# Altium PCB Mikrofonvorverstärker.PcbDoc
Units mm, origin at the board's own origin, x right, y up, seen from the top; angles counter-clockwise.
Board outline 150 x 75 mm, 2 copper layers (Top Layer, Bottom Layer); 137 components, 87 nets, 356 pads, 19 vias.
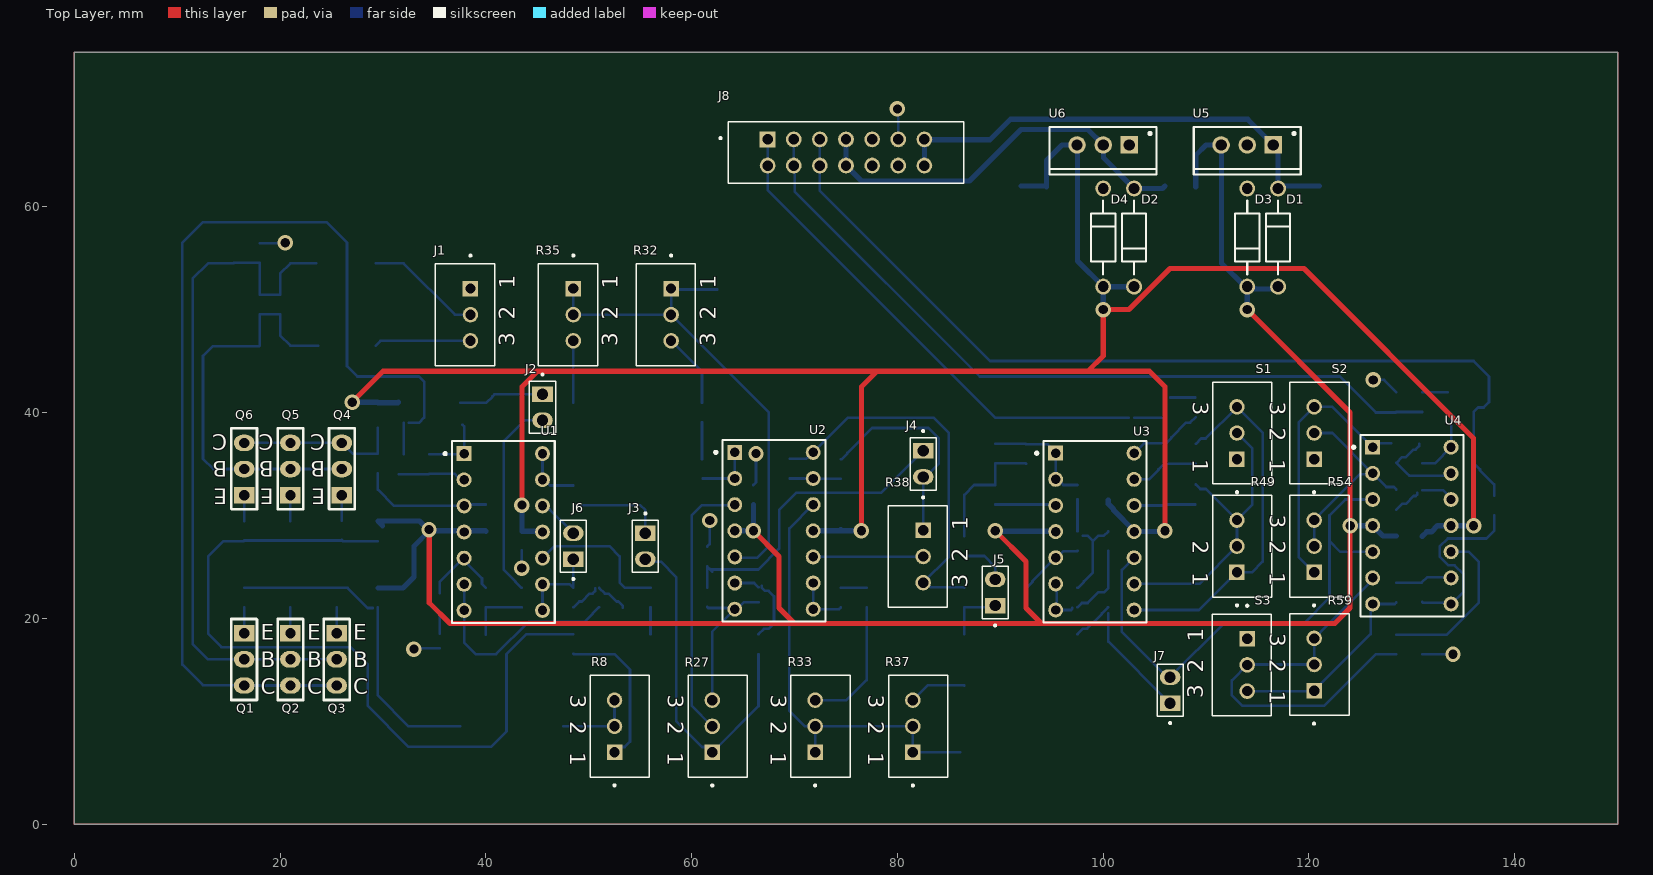
[diagram p0: Top Layer view]
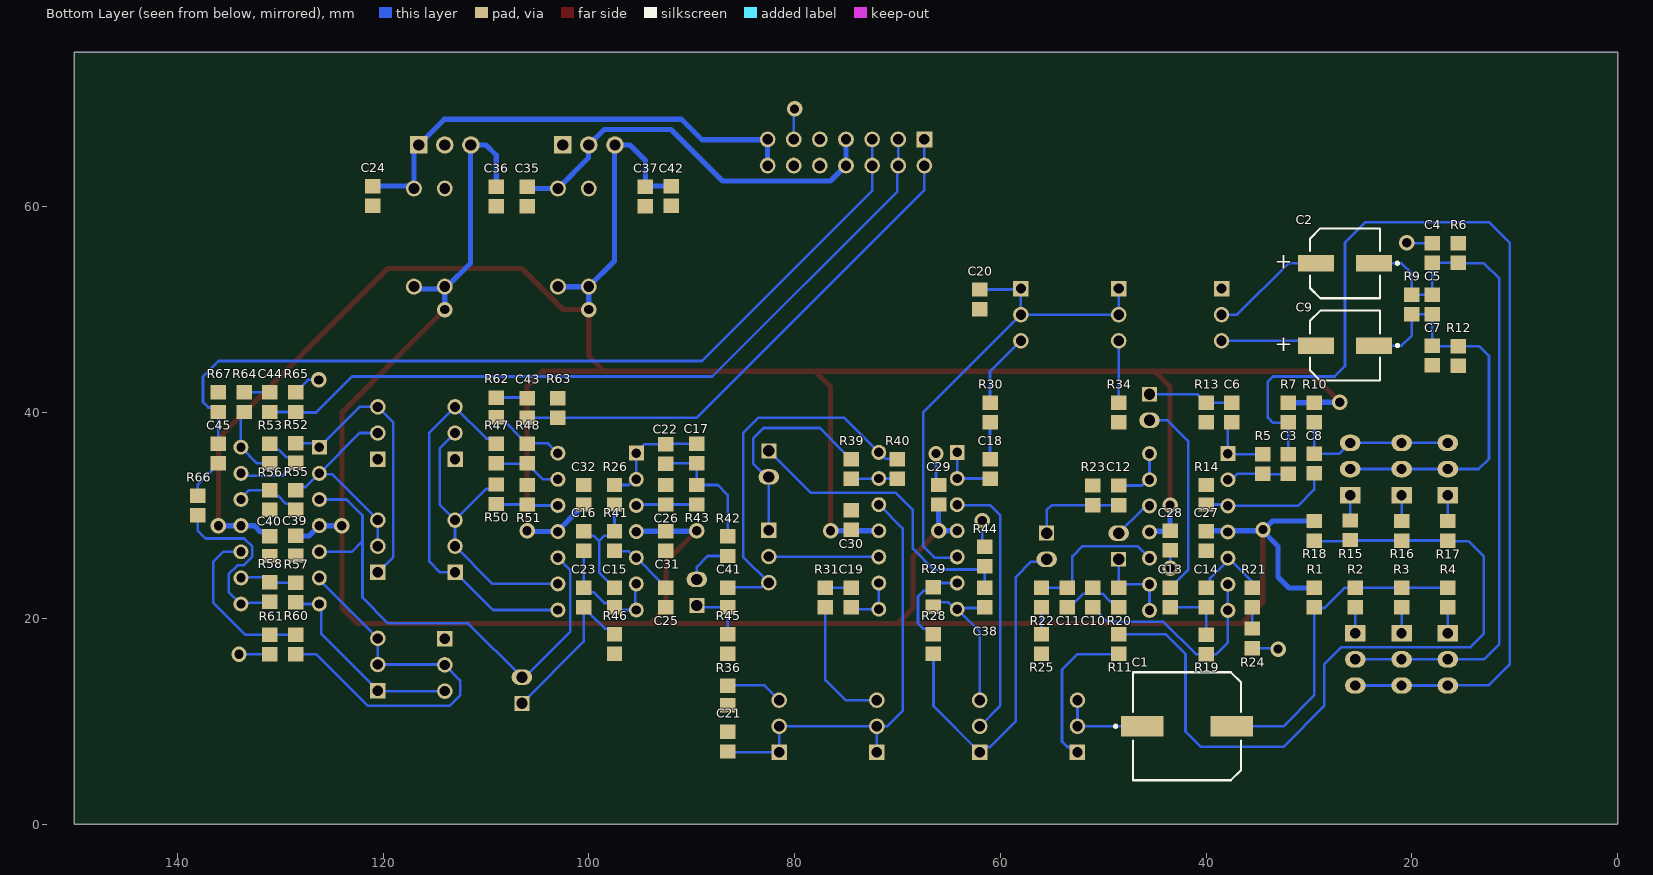
[diagram p1: Bottom Layer view, seen from below]
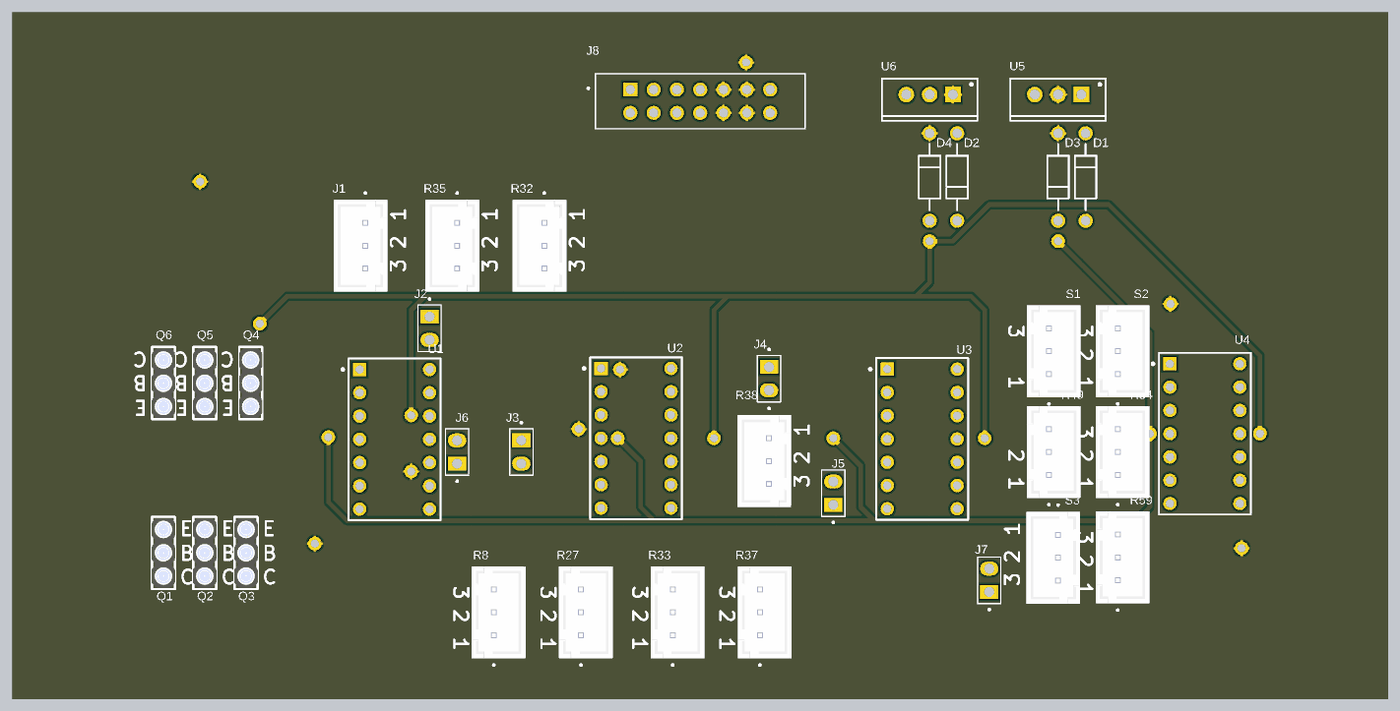
[diagram p2: 3D render of the assembled board from above, using the file's embedded part models]
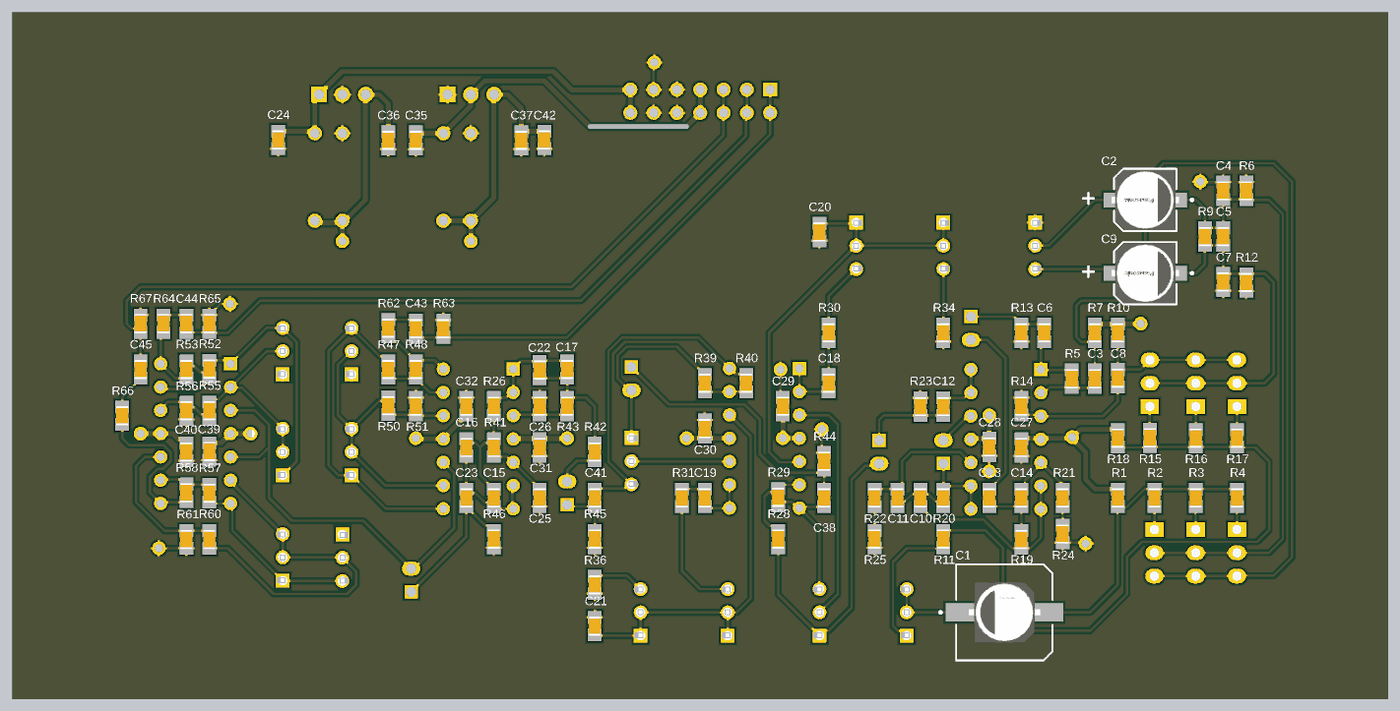
[diagram p3: 3D render of the assembled board from below, using the file's embedded part models]

## Layer stack, top to bottom
Top Solder: solder mask 0.0102, Solder Resist, Dk 3.5
Top Layer: signal copper 0.0356
Dielectric 1: dielectric 0.32, FR-4, Dk 4.8
Bottom Layer: signal copper 0.0356
Bottom Solder: solder mask 0.0102, Solder Resist, Dk 3.5

## Board outline
0,0 0,75 150,75 150,0 145,0

## Design rules (kind name [scope] priority, off if disabled: settings)
Clearance [All] p1: gap=0.254 ignorepadtopadclearanceinfootprint=FALSE
PolygonConnect [All] p1: connectstyle=Relief reliefconductorwidth=0.254 reliefentries=4 polygonreliefangle="90 Angle" airgapwidth=0.254
RoutingVias [All] p1: holewidth=0.9 width=1.5 viastyle="Through Hole" minholewidth=0.711 minwidth=1.27 maxholewidth=0.914 maxwidth=1.524
SolderMaskExpansion [All] p1: expansion=0.102 istentingtop=FALSE
Width -Vin [InNet('-Vin')] p1: maxlimit=0.508 minlimit=0.254 preferedwidth=0.508
Width -18V [InNet('-18V')] p2: maxlimit=0.508 minlimit=0.254 preferedwidth=0.508
Width +Vin [InNet('+Vin')] p3: maxlimit=0.508 minlimit=0.254 preferedwidth=0.508
Width +18V [InNet('+18V')] p4: maxlimit=0.508 minlimit=0.254 preferedwidth=0.508
Width [All] p5: maxlimit=0.254 minlimit=0.203 preferedwidth=0.254
30 further rules are at their usual default settings.

## Classes and differential pairs
component class Parametrischer_EQ: C18 C19 C20 C21 C24 C35 C36 C37 C38 C41 C42 D1 D2 D3 D4 J3 J4 J5 R27 R28 R29 R30 R31 R32 R33 R34 R35 R36 R37 R38 R39 R40 R44 R45 U2 U5 U6
component class Mic_Eingangsstufe: C1 C2 C3 C4 C5 C6 C7 C8 C9 J1 Q1 Q2 Q3 Q4 Q5 Q6 R1 R2 R3 R4 R5 R6 R7 R8 R9 R10 R11 R12 R13 R14 R15 R16 R17 R18 U1
component class Linkwitz_Riley: C10 C11 C12 C13 C14 C15 C16 C17 C22 C23 C25 C26 C27 C28 C29 C30 C31 C32 C39 C40 J2 J6 J7 R19 R20 R21 R22 R23 R24 R25 R26 R41 R42 R43 R46 U3
component class AUX_Stufe: C43 C44 C45 J8 R47 R48 R49 R50 R51 R52 R53 R54 R55 R56 R57 R58 R59 R60 R61 R62 R63 R64 R65 R66 R67 S1 S2 S3 U4

## Components (designator, comment, footprint, x,y, rotation, side; value= is the part's Value field where it differs from the comment)
C1 "100u" "4141 Kondensator" 41.85,9.5 r180 bottom
C2 "47uF" "2626 Kondensator" 26.5,54.5 r0 bottom
C3 "4.7u" 0805 32,35 r90 bottom
C4 "1n" 0805 18,55.5 r270 bottom
C5 "1n" 0805 18,50.5 r90 bottom
C6 "100n" 0805 37.5,40 r90 bottom
C7 "1n" 0805 18,45.55 r270 bottom
C8 "4.7u" 0805 29.5,35.05 r90 bottom
C9 "47uF" "2626 Kondensator" 26.5,46.5 r0 bottom
C10 "22n" 0805 51,22 r90 bottom
C11 "22n" 0805 53.5,22 r90 bottom
C12 "100n" 0805 48.5,31.95 r270 bottom
C13 "22n" 0805 43.5,22 r270 bottom
C14 "22n" 0805 40,22 r90 bottom
C15 "22n" 0805 97.5,22 r270 bottom
C16 "22n" 0805 100.5,27.5 r270 bottom
C17 "22n" 0805 89.5,36 r90 bottom
C18 "3.3n" 0805 61,34.5 r90 bottom
C19 "100n" 0805 74.5,22 r270 bottom
C20 "470p" 0805 62,51 r90 bottom
C21 "15n" 0805 86.5,8 r90 bottom
C22 "22n" 0805 92.5,35.95 r90 bottom
C23 "100n" 0805 100.5,22 r270 bottom
C24 "330n" 0805 121,61.05 r90 bottom
C25 "22n" 0805 92.5,22 r90 bottom
C26 "22n" 0805 92.5,32 r270 bottom
C27 "100n" 0805 40,27.5 r90 bottom
C28 "100n" 0805 43.5,27.55 r90 bottom
C29 "100n" 0805 66,32 r270 bottom
C30 "100n" 0805 74.5,29.55 r270 bottom
C31 "100n" 0805 92.5,27.5 r90 bottom
C32 "100n" 0805 100.5,32 r270 bottom
C35 "2u" 0805 106,61 r90 bottom
C36 "100n" 0805 109,61 r90 bottom
C37 "1u" 0805 94.5,61 r90 bottom
C38 "100n" 0805 61.5,22 r90 bottom
C39 "100n" 0805 128.5,27.05 r90 bottom
C40 "100n" 0805 131,27 r90 bottom
C41 "100n" 0805 86.5,22 r270 bottom
C42 "100n" 0805 92,61.05 r270 bottom
C43 "100n" 0805 106,40.45 r270 bottom
C44 "100n" 0805 131,41 r270 bottom
C45 "100n" 0805 136,36 r90 bottom
D1 "1N4001 Diode" "1N4001 Diode" 117,57 r270 top
D2 "1N4001 Diode" "1N4001 Diode" 103,57 r90 top
D3 "1N4001 Diode" "1N4001 Diode" 114,57 r90 top
D4 "1N4001 Diode" "1N4001 Diode" 100,57 r270 top
J1 "Connector x3" "Connector x3" 38.5,49.5 r90 top
J2 "Connector x2" "Connector x2" 45.5,40.5 r270 top
J3 "Connector x2" "Connector x2" 55.5,27 r270 top
J4 "Connector x2" "Connector x2" 82.5,35 r270 top
J5 "Connector x2" "Connector x2" 89.5,22.5 r90 top
J6 "Connector x2" "Connector x2" 48.5,27 r90 top
J7 "Connector x2" "Connector x2" 106.5,13 r90 top
J8 "Connector x14" "Connector x14" 75,64 r180 top
Q1 "PNP" "Buchsenleiste 3 Fach PNP TO92" 16.5,18.54 r0 top
Q2 "PNP" "Buchsenleiste 3 Fach PNP TO92" 21,18.54 r0 top
Q3 "PNP" "Buchsenleiste 3 Fach PNP TO92" 25.5,18.54 r0 top
Q4 "PNP" "Buchsenleiste 3 Fach PNP TO92" 26,31.96 r180 top
Q5 "PNP" "Buchsenleiste 3 Fach PNP TO92" 21,31.96 r180 top
Q6 "PNP" "Buchsenleiste 3 Fach PNP TO92" 16.5,31.96 r180 top
R1 "7.5k" 0805 29.5,22 r270 bottom
R2 "10" 0805 25.5,22 r270 bottom
R3 "10" 0805 21,22 r270 bottom
R4 "10" 0805 16.5,22 r270 bottom
R5 "27k" 0805 34.5,35 r270 bottom
R6 "4.7k" 0805 15.5,55.5 r270 bottom
R7 "4.7k" 0805 32,40 r270 bottom
R8 "10k log" "Connector x3" 52.5,9.5 r270 top
R9 "4.7k" 0805 20,50.5 r90 bottom
R10 "4.7k" 0805 29.5,40 r90 bottom
R11 "47R" 0805 48.5,17.5 r270 bottom
R12 "4.7k" 0805 15.5,45.5 r270 bottom
R13 "220k" 0805 40,40 r90 bottom
R14 "27k" 0805 40,32 r270 bottom
R15 "10" 0805 26,28.55 r90 bottom
R16 "10" 0805 21,28.5 r90 bottom
R17 "10" 0805 16.5,28.5 r90 bottom
R18 "7.5k" 0805 29.5,28.5 r270 bottom
R19 "180k" 0805 40,17.45 r270 bottom
R20 "180k" 0805 48.5,22 r90 bottom
R21 "180k" 0805 35.5,22 r90 bottom
R22 "180k" 0805 56,22 r90 bottom
R23 "220k" 0805 51,31.95 r270 bottom
R24 "180k" 0805 35.5,18.05 r90 bottom
R25 "180k" 0805 56,17.5 r90 bottom
R26 "270R" 0805 97.5,32 r90 bottom
R27 "47k lin" "Connector x3" 62,9.5 r270 top
R28 "2.2k" 0805 66.5,17.5 r90 bottom
R29 "2.2k" 0805 66.5,22.05 r270 bottom
R30 "6.8k" 0805 61,40 r90 bottom
R31 "6.8k" 0805 77,22 r90 bottom
R32 "100k log" "Connector x3" 58,49.5 r90 top
R33 "100k log" "Connector x3" 72,9.5 r270 top
R34 "6.8k" 0805 48.5,40 r90 bottom
R35 "100k log" "Connector x3" 48.5,49.5 r90 top
R36 "6.8k" 0805 86.5,12.5 r270 bottom
R37 "100k log" "Connector x3" 81.5,9.5 r270 top
R38 "47k lin" "Connector x3" 82.5,26 r90 top
R39 "2.2k" 0805 74.5,34.5 r270 bottom
R40 "2.2k" 0805 70,34.5 r90 bottom
R41 "270R" 0805 97.5,27.5 r90 bottom
R42 "270R" 0805 86.5,27 r270 bottom
R43 "270R" 0805 89.5,32 r90 bottom
R44 "220k" 0805 61.5,26 r270 bottom
R45 "220k" 0805 86.5,17.5 r90 bottom
R46 "220k" 0805 97.5,17.5 r90 bottom
R47 "470R" 0805 109,36 r270 bottom
R48 "1k" 0805 106,36 r90 bottom
R49 "50k log" "Connector x3" 113,27 r270 top
R50 "470R" 0805 109,32.05 r270 bottom
R51 "1k" 0805 106,32 r270 bottom
R52 "470R" 0805 128.5,36.05 r270 bottom
R53 "1k" 0805 131,36 r270 bottom
R54 "50k log" "Connector x3" 120.5,27 r270 top
R55 "470R" 0805 128.5,31.5 r270 bottom
R56 "1k" 0805 131,31.5 r90 bottom
R57 "470R" 0805 128.5,22.5 r90 bottom
R58 "1k" 0805 131,22.55 r270 bottom
R59 "50k log" "Connector x3" 120.5,15.5 r270 top
R60 "470R" 0805 128.5,17.45 r90 bottom
R61 "1k" 0805 131,17.45 r90 bottom
R62 "470R" 0805 109,40.5 r90 bottom
R63 "220k" 0805 103,40.45 r270 bottom
R64 "470R" 0805 133.5,41 r90 bottom
R65 "220k" 0805 128.5,41 r270 bottom
R66 "470R" 0805 138,30.95 r90 bottom
R67 "220k" 0805 136,41 r270 bottom
S1 "Schalter Buchsenleiste" "Connector x3" 113,38 r270 top
S2 "Schalter Buchsenleiste" "Connector x3" 120.5,38 r270 top
S3 "Schalter Buchsenleiste" "Connector x3" 114,15.46 r90 top
U1 "OPA4134UA" "DIP14 IC Socket" 41.69,28.38 r90 top
U2 "OPA4134UA" "DIP14 IC Socket" 68,28.5 r90 top
U3 "OPA4134UA" "DIP14 IC Socket" 99.19,28.42 r90 top
U4 "OPA4134UA" "DIP14 IC Socket" 130,29 r90 top
U5 "7818" "TO220 Spannungsregler 78xx" 114,66 r180 top
U6 "7918" "TO220 Spannungsregler 79xx" 100,66 r180 top

## Footprints (in the part's own frame and the unit in brackets; to place one, negate y for a bottom-side part, rotate by r counter-clockwise, add the part's x,y. Pads: shape width x height; smd on the part's side, far side on the other; paste and mask are expansions set on the pad)
"1N4001 Diode" [mm] "AXIAL, 2-Leads, Diameter 2.35mm"
  round 1.55 hole 1.05: 1(-4.77,0) 2(4.77,0)
  silkscreen extent -3.59,-1.17 3.59,1.17
0805 [mm] "0805"
  rect 1.4x1.5 smd: 1(-0.95,0) 2(0.95,0)
  body extent -1.05,-0.67 1.05,0.67, height 1.35
"2626 Kondensator" [mm] "2626 Kondensator d=6.6mm"
  rect 3.5x1.6 smd paste+0 mask+0: 1(-2.8,0) 2(2.8,0)
  silkscreen extent -5.22,-3.4 3.4,3.4, body extent -3.65,-3.3 3.65,3.3, height 6
"4141 Kondensator" [mm]
  rect 4.1x2 smd paste+0 mask+0: 1(-4.35,0) 2(4.35,0)
  silkscreen extent -7.07,-5.25 5.25,5.25, body extent -3.9,-3.3 3.9,3.3, height 6.1
"Buchsenleiste 3 Fach PNP TO92" [mm] "Buchsenleiste 3 Fach"
  rect 2x1.6 hole 1: 1(0,0)
  oval 2x1.6 hole 1: 2(0,-2.54) 3(0,-5.08)
  silkscreen extent -1.25,-6.49 1.25,1.39, body extent -1.27,-6.35 1.27,1.27, height 7.01
"Connector x2" [mm]
  rect 1.508x2 / inner round 1.45 / far side rect 1.45x1.45 hole 1.1: 01(-1.27,0)
  oval 1.508x2 hole 1.1: 02(1.27,0)
  silkscreen extent -3.29,-1.27 2.54,1.27
"Connector x3" [mm] "Connector x3"
  rect 1.508x1.508 / inner round 1.508 / far side rect 1.508x1.508 hole 1: 1(2.54,0)
  round 1.508 hole 1: 2(0,0) 3(-2.54,0)
  silkscreen extent -4.95,-2.35 5.85,3.4, body extent -4.95,-2.35 4.95,3.4, height 7
"Connector x14" [mm]
  rect 1.53x1.53 hole 1.02: 1(7.62,-2.54)
  round 1.53 hole 1.02: 2(7.62,0) 3(5.08,-2.54) 4(5.08,0) 5(2.54,-2.54) 6(2.54,0) 7(0,-2.54) 8(0,0) 9(-2.54,-2.54) 10(-2.54,0) 11(-5.08,-2.54) 12(-5.08,0) 13(-7.62,-2.54) 14(-7.62,0)
  silkscreen extent -11.43,-4.27 12.3,1.73
"DIP14 IC Socket" [mm] "Socket, 14-Leads, Body 17.653x10.0076mm, Pitch 2.54mm"
  rect 1.45x1.45 hole 0.911: 1(7.62,3.81)
  round 1.45 hole 0.911: 2(5.08,3.81) 3(2.54,3.81) 4(0,3.81) 5(-2.54,3.81) 6(-5.08,3.81) 7(-7.62,3.81) 8(-7.62,-3.81) 9(-5.08,-3.81) 10(-2.54,-3.81) 11(0,-3.81) 12(2.54,-3.81) 13(5.08,-3.81) 14(7.62,-3.81)
  silkscreen extent -8.83,-5 8.83,5.78, body extent -8.83,-5 8.83,5, height 5.36
"TO220 Spannungsregler 78xx" [mm] "TO, Thru-Hole, Vertical, Heatsink Mounted; 3 In-Line Leads; Pitch 2.54 mm"
  rect 1.7x1.7 hole 1.1: 1(-2.54,0)
  round 1.7 hole 1.1: 2(0,0) 3(2.54,0)
  silkscreen extent -5.2,-1.75 5.2,2.85, body extent -5.25,-1.8 5.25,2.9, height 19.7
"TO220 Spannungsregler 79xx" [mm] "TO, Thru-Hole, Vertical, Heatsink Mounted; 3 In-Line Leads; Pitch 2.54 mm"
  rect 1.7x1.7 hole 1.1: 1(-2.54,0)
  round 1.7 hole 1.1: 2(0,0) 3(2.54,0)
  silkscreen extent -5.2,-1.75 5.2,2.85, body extent -5.25,-1.8 5.25,2.9, height 19.7

## Part data
C1: library part "4141 Kondensator", "4141Kondensator"
C2 C9: library part "2626 Kondensator", "2626 Kondensator d=6.6mm", Case/Package=Radial, ESR (Equivalent Series Resistance)=30mR, Leakage Current=235uA, Max Operating Temperature=105°C, Min Operating Temperature=-55°C, Package Quantity=1000, Ripple Current=2.8A, Tolerance=20%, Voltage=25V, Diameter=6.3mm, Dissipation Factor=12%, Height=5.9mm, Height - Seated (Max)=0.236inch, Length=5.9mm, Life (Hours)=5000Hour, Mount="Surface Mount", Number of Pins=6, Packaging="Tape and Reel", Polarity=Polar, REACH SVHC="No SVHC", Ripple Current (AC)=2.8A, RoHS Compliant=Yes, Series="OS-CON™, SVPF", Termination=SMD/SMT, Voltage Rating=25V, Voltage Rating (DC)=25V
C3 C4 C5 C6 C7 C8 C10 C11 C12 C13 C14 C15 C16 C17 C18 C19 C20 C21 C22 C23 C24 C25 C26 C27 C28 C29 C30 C31 C32 C35 C36 C37 C38 C39 C40 C41 C42 C43 C44 C45: library part "0805 Kondensator", "0805 Kondensator"
D1 D2 D3 D4: "Standard Recovery Rectifier, 2-Pin Axial_Lead, Pb-Free, Bulk Bag", Manufacturer="On Semiconductor", PartNumber=1N4001, ComponentLink1Description="Manufacturer URL", ComponentLink1URL=http://www.onsemi.com/, ComponentLink2Description=Datasheet, ComponentLink2URL=http://www.onsemi.com/pub_link/Collateral/1N4001-D.PDF, ComponentLink3Description="Package Specification", ComponentLink3URL=http://www.onsemi.cn/pub_link/Collateral/59-10.PDF, DatasheetVersion="Rev. 13", IFSM Max (A)=30, IO(rec) Max (A)=1, Mounting Technology="Through Hole", PackageDescription="2-Pin, Axial Lead, Diameter 2.35 mm", PackageReference=AXIAL_LEAD-2-59-10, PackageVersion="Rev. U, 02/2005", Packing="Bulk Bag", RoHS=TRUE, Type="Standard Recovery", VRRM Max (V)=50
J1: "Connector Header Through Hole 3 position 0.100 (2.54mm)", Package=None, Check_prices=https://www.snapeda.com/parts/B3B-XH-A/JST+Sales+America+Inc./view-part/?ref=eda, MF="JST Sales", MP=B3B-XH-A, SnapEDA_Link=https://www.snapeda.com/parts/B3B-XH-A/JST+Sales+America+Inc./view-part/?ref=snap
J2 J3 J4 J5 J6 J7: "Connector Header Through Hole 2 position 0.100 (2.54mm)", Package=None, Check_prices=https://www.snapeda.com/parts/61300211121/Wurth+Elektronik/view-part/?ref=eda, MF="Wurth Elektronik", MP=61300211121, SnapEDA_Link=https://www.snapeda.com/parts/61300211121/Wurth+Elektronik/view-part/?ref=snap
J8: "14 Position Header Connector Through Hole", Package=None, Availability=Warning, Check_prices=https://www.snapeda.com/parts/SFH11-PBPC-D07-ST-BK/Sullins%20Connector%20Solutions/view-part/851415/?ref=eda, MF="Sullins Connector", MP=SFH11-PBPC-D07-ST-BK, Price=None, Purchase-URL=https://pricing.snapeda.com/search/part/SFH11-PBPC-D07-ST-BK/?ref=eda, SnapEDA_Link=https://www.snapeda.com/parts/SFH11-PBPC-D07-ST-BK/Sullins%20Connector%20Solutions/view-part/851415/?ref=snap
Q1 Q2 Q3 Q4 Q5 Q6: library part "TO-92 PNP BUchsenleiste", "TO-92 PNP Bipolar Transistor", Typ=PNP
R1 R2 R3 R4 R5 R6 R7 R9 R10 R11 R12 R13 R14 R15 R16 R17 R18 R19 R20 R21 R22 R23 R24 R25 R26 R28 R29 R30 R31 R34 R36 R39 R40 R41 R42 R43 R44 R45 R46 R47 R48 R50 R51 R52 R53 R55 R56 R57 R58 R60 R61 R62 R63 R64 R65 R66 R67: library part "0805 Widerstand", "0805 Widerstand"
R8 R27 R32 R33 R35 R37 R38 R49 R54 R59: library part "Potentiometer Buchsenleiste", "Potentiometer"
S1 S2 S3: "Toggle Switch SPDT Through Hole", Package=None, Availability=Unavailable, MP=100SP1T1B4M2QE, Price=None
U1 U2 U3 U4: library part "SOIC OPA4134UA", "SoundPlus(TM) High Performance Audio Operational Amplifier, 5 to 36 V, -55 to 125 degC, 14-pin SOIC (D14), Green (RoHS & no Sb/Br)", Manufacturer="Texas Instruments", Code_JEDEC=MS-012, ComponentLink1Description="Manufacturer URL", ComponentLink1URL=http://www.ti.com/, ComponentLink2Description=Datasheet, ComponentLink2URL=http://www.ti.com/general/docs/lit/getliterature.tsp?genericPartNumber=OPA4134&fileType=pdf, ComponentLink3Description="Package Specification", ComponentLink3URL=http://www.ti.com/lit/ml/mpds177g/mpds177g.pdf, DatasheetVersion=SBOS058, Eco-Plan="Green (RoHS & no Sb/Br)", GBW(Typ)(MHz)=8, Iq per channel(Max)(mA)=5, Mounting Technology="Surface Mount", Number of Channels=4, PackageDescription="14-Pin Plastic Small Outline, Body 8.65 x 3.9 mm, Pitch 1.27 mm", PackageReference=D0014A, PackageVersion="4040047-5/M, 06/2011", PartNumber=OPA4134UA, SubFamily="Audio Operational Amplifier", Vmax(V)=36, Vmin(V)=5, Vn at Flatband(Typ)(nV/rtHz)=8
U5: library part "TO 220 Spannungsregler 78xx", "Voltage Regulator, 3-Pin TO-220", Typ=7818
U6: library part "TO 220 Spannungsregler 79xx", "Voltage Regulator, 3-Pin TO-220", Typ=7818

## Via types
v1: diameter 1.5, hole 0.9, Top Layer to Bottom Layer, 19 vias

## Nets (pads, with @x,y where several pads share a name; then routed paths per layer and width w, separated by ;. In a path a pad name is that pad's centre, name@x,y a point inside that pad or via, vN(x,y) a via of type N, cw(c..) or ccw(c..) an arc to the next point about the centre after c; other vN are vias at no path point)
+18V: C27.2 C29.2 C31.2 C36.2 C39.2 D1.2 D3.1 R1.1 R18.1 U1.4 U2.4 U3.4 U4.4 U5.3 | length 214.7
  Top Layer w0.508: v1(34.467,28.613) 34.5,28.58 34.5,21.5 36.5,19.5 70,19.5 ; v1(66,28.5) 68.5,26 68.5,21 70,19.5 ; v1(89.5,28.5) 92.5,25.5 92.5,21 94,19.5 ; v1(114,50) 124,40 124,21 122.5,19.5 94,19.5 ; 70,19.5 94,19.5
  Bottom Layer w0.508: R1.1 31.95,22.95 33,24 33,27 34.5,28.5 37.76,28.5 U1.4 ; R18.1@29.95,29 R18.1 33.55,29.45 34.387,28.613 v1(34.467,28.613) ; U1.4@38,28.5 39.95,28.5 C27.2 ; U2.4 v1(66,28.5) C29.2 ; v1(89.5,28.5) 89.55,28.45 U3.4@95.45,28.45 ; C36.2 109,65 110,66 U5.3 ; U5.3@111.5,66 111.5,54.5 113.77,52.23 D3.1 ; v1(114,50) D3.1 ; D1.2 116.718,52.23 116.488,52 114.819,52 114.788,52.031 114.199,52.031 D3.1 ; v1(124,29) U4.4 127.19,28 C39.2
+Vin: C24.2 D1.1 J8.13 J8.14 U5.1 | length 46.2
  Bottom Layer w0.508: J8.14 J8.13 ; J8.13@83.168,66.5 89,66.5 91,68.5 114.04,68.5 117,65.54 D1.1@117,61.27 ; D1.1@117.5,62 C24.2
-18V: C28.2 C30.2 C32.2 C37.2 C40.2 C42.1 D2.1 D4.2 R7.1 R10.2 U1.11 U2.11 U3.11 U4.11 U6.3 | length 238.7
  Top Layer w0.508: v1(27,41) 30,44 45,44 ; v1(43.5,31) 43.5,42.5 45,44 ; v1(76.5,28.5) 76.5,42.5 78,44 ; v1(106,28.5) 106,42.5 104.5,44 98.5,44 ; v1@136,29.5 136,37.5 119.5,54 106.5,54 102.5,50 v1(100,50) 100,45.5 98.5,44 ; 45,44 78,44 ; 78,44 98.5,44
  Bottom Layer w0.508: v1(27,41) 29.45,41 R10.2 31.45,40.95 R7.1@31.5,41 ; C28.2@43.5,28.45 45.43,28.45 U1.11 ; C28.2 v1(43.5,31) ; U2.11 C30.2@74.5,28.5 ; C30.2 74.6,28.5 v1(76.5,28.5) ; C42.1 94.45,62 C37.2 94.5,64.5 96,66 U6.3 ; U6.3@97.5,66 97.5,54.73 D4.2 v1(100,50) ; D4.2@100.135,52.365 100.27,52.23 D2.1 ; C32.2@100.5,31.5 100.5,31.1 100.996,30.604 100.996,30.504 103,28.5 U3.11 105.92,28.42 v1(106,28.5) ; C40.2 131.446,28.396 131.896,28.396 132.5,29 v1(136,29)
-Vin: C35.2 D2.2 J8.7 J8.8 U6.2 | length 39.4
  Bottom Layer w0.508: J8.7 J8.8 76.5,62.5 87,62.5 92,67.5 98.5,67.5 100.017,65.983 100.017,64.753 D2.2 105.77,61.77 C35.2@106,62
A03: R27.2 U2.3 | length 25.9
  Bottom Layer w0.254: R27.2 60,11.5 60,30 61,31 64.15,31 U2.3
A04: C20.2 R32.1 R32.2 R35.1 R35.2 U2.5 | length 48.5
  Bottom Layer w0.254: R35.1 R35.2 R32.2@57.5,49.5 ; C20.2@62.5,51.95 58.09,51.95 R32.1 58,51.95 R32.2 67.5,40 67.5,27 66.38,25.88 U2.5@64.5,25.88
A05: C38.2 J4.01 R44.2 | length 30.9
  Bottom Layer w0.254: C38.2 R44.2@61.5,25 ; R44.2@62,24.5 R44.2@61.5,25 ; J4.01 78.435,32.205 70.191,32.205 68.5,30.514 68.5,26.756 66.476,24.732 63.017,24.732 61.818,24.732 R44.2 R44.2@61.5,25
A06: R38.2 U2.10 | length 10.2
  Bottom Layer w0.254: U2.10 R38.2@82.04,25.96
A07: C21.1 R33.1 R33.2 R37.1 R37.2 U2.12 | length 43.3
  Bottom Layer w0.254: U2.12 69.5,28.73 69.5,11 71,9.5 R33.2 ; R33.1 R33.2 ; C21.1@86.09,6.96 R37.1 R37.2 R33.2
Aux01: C43.2 J8.1 J8.2 R63.2 | length 52.2
  Bottom Layer w0.254: J8.1 67.38,61.62 89.5,39.5 R63.2@102.5,39.5 ; R63.2 C43.2
Aux02: C44.2 J8.3 J8.4 R65.2 | length 75
  Bottom Layer w0.254: J8.4 J8.3 ; J8.4@70,64 70,61.5 88,43.5 123,43.5 126.5,40 128.45,40 R65.2 C44.2
Heiß: C2.2 J1.2 | length 11.3
  Bottom Layer w0.254: C2.2 32,54.5 37,49.5 J1.2
Kalt: C9.2 J1.3 | length 9.4
  Bottom Layer w0.254: C9.2 29.76,46.96 J1.3
Masse: C4.1 C7.2 C20.1 C21.2 C24.1 C25.1 C26.1 C27.1 C28.1 C29.1 C30.1 C31.1 C32.1 C35.1 C36.1 C37.1 C39.1 C40.1 C42.2 D3.2 D4.1 J1.1 J8.9 J8.10 J8.11 J8.12 R6.1 R12.2 R13.1 R14.1 R23.1 R24.1 R25.1 R34.1 R36.2 R44.1 R45.1 R46.1 R51.1 R56.1 R61.1 R63.1 R65.1 R67.1 U5.2 U6.1 | length 21.3
  Bottom Layer w0.254: C4.1 20.45,56.45 v1(20.5,56.5) ; v1(33,17) 33.1,17.1 R24.1 ; v1(43.493,24.879) 43.493,26.593 C28.1 ; R44.1 61.75,27.2 v1(61.75,29.5) ; C29.1 66.25,33.2 v1(66.25,36) ; v1(80,69.5) 80.08,69.42 J8.11 ; v1(126.251,43.162) 127.288,43.162 127.45,43 R65.1 ; R61.1 v1(134,16.5)
NetC1_1: C1.1 R8.2 R8.3 | length 7
  Bottom Layer w0.254: C1.1@47.5,9.5 R8.2 R8.3@52.5,11.5
NetC1_2: C1.2 R1.2 R2.1 R3.1 R4.1 | length 31.1
  Bottom Layer w0.254: R4.1 26.55,22.95 28.5,21 R1.2@29,21 ; R1.2 29.5,12.5 32.5,9.5 C1.2
NetC2_1: C2.1 C4.2 C5.2 Q1.2 Q2.2 Q3.2 R6.2 R9.2 | length 68.3
  Bottom Layer w0.254: R9.2 C5.2 C4.2 R6.2 15.45,54.5 13,54.5 11.5,53 11.5,17.5 13,16 Q3.2 ; R9.2@20,51.5 20,53.5 21,54.5 C2.1@23.5,54.5
NetC3_1: C3.1 R5.2 U1.2 | length 6.6
  Bottom Layer w0.254: C3.1@31.55,34 34.45,34 R5.2 36.95,34.05 37.311,33.689 37.651,33.689 U1.2
NetC3_2: C3.2 Q1.3 Q2.3 Q3.3 R7.2 | length 102.9
  Bottom Layer w0.254: Q1.3 Q3.3 ; Q1.3@16.5,13.5 12.5,13.5 10.5,15.5 10.5,56.5 12.5,58.5 24.5,58.5 26.5,56.5 26.5,44.5 27.5,43.5 33.5,43.5 34,43 34,39.5 33.5,39 R7.2@32.5,39 ; C3.2 R7.2@32,39
NetC5_1: C5.1 C7.1 C9.1 Q4.2 Q5.2 Q6.2 R9.1 R12.1 | length 41
  Bottom Layer w0.254: C9.1 21,46.5 20,47.5 R9.1 C5.1 C7.1 17.95,46.45 13.45,46.45 12.5,45.5 12.5,35.5 13.5,34.5 Q4.2
NetC6_1: C6.1 R5.1 U1.1 | length 5.9
  Bottom Layer w0.254: R5.1 37.45,35.95 U1.1@37.5,36 ; C6.1@37.711,38.811 37.88,38.642 U1.1
NetC6_2: C6.2 J2.01 R13.2 | length 8.4
  Bottom Layer w0.254: C6.2 40.05,40.95 40.623,41.523 40.623,41.573 40.82,41.77 J2.01
NetC8_1: C8.1 R14.2 U1.3 | length 12.7
  Bottom Layer w0.254: C8.1 29.5,32.5 31.08,30.92 U1.3 ; U1.3@38,31 38.05,31.05 R14.2
NetC8_2: C8.2 Q4.3 Q5.3 Q6.3 R10.1 | length 15.9
  Bottom Layer w0.254: Q6.3 Q4.3 27.04,36 C8.2 R10.1@29.5,38.5
NetC10_1: C10.1 R19.2 U1.6 U1.7 | length 21.2
  Bottom Layer w0.254: U1.6 37.88,17.62 39,16.5 41,16.5 44.152,19.652 49.602,19.652 50.377,20.427 50.377,20.477 50.95,21.05 C10.1
NetC10_2: C10.2 C11.1 R20.1 | length 6.3
  Bottom Layer w0.254: R20.1 49.073,21.623 49.329,21.623 50.088,22.381 50.377,22.381 50.625,22.629 C10.2@50.625,22.919 ; C10.2 51.554,22.396 51.927,22.396 52.7,21.623 52.877,21.623 53.306,21.194 C11.1@53.306,21.017
NetC11_2: C11.2 R22.2 U1.10 | length 14.2
  Bottom Layer w0.254: U1.10 46.66,27 52,27 53,26 53,23.45 C11.2 R22.2
NetC12_1: C12.1 U1.13 U1.14 | length 5.8
  Bottom Layer w0.254: U1.14 U1.13 45.687,33.46 46.247,32.9 C12.1
NetC12_2: C12.2 J3.01 R23.2 | length 9.4
  Bottom Layer w0.254: C12.2 55,31 55.5,30.5 J3.01
NetC13_1: C13.1 J2.02 | length 19.6
  Bottom Layer w0.254: C13.1 43.45,22.95 42.877,23.523 42.877,23.573 41.743,24.707 41.743,37.243 43.73,39.23 J2.02
NetC13_2: C13.2 C14.1 R19.1 | length 6.1
  Bottom Layer w0.254: R19.1 C14.1 C13.2
NetC14_2: C14.2 R21.2 U1.5 | length 7.6
  Bottom Layer w0.254: R21.2@35.5,22.45 35.5,23.5 U1.5@37.5,25.5 ; U1.5 37.88,25.62 39.618,23.882 39.618,23.332 C14.2
NetC15_1: C15.1 C16.1 R26.1 R41.2 | length 11.4
  Bottom Layer w0.254: C15.1 97.55,22.95 98.123,23.523 98.123,23.573 99,24.45 99,27.5 ; R41.2 R26.1@97.5,31.55 ; R41.2@98,28 98.5,28 99,27.5 ; C16.1 100.05,28 99.5,28 99,27.5
NetC15_2: C15.2 C16.2 C23.1 U3.6 U3.7 | length 11.8
  Bottom Layer w0.254: U3.6 95.5,23.22 95.5,20.92 U3.7 96.877,20.8 97,20.923 C15.2@97,21 ; C15.2 97.932,21.482 98.482,21.482 99.518,22.518 100.068,22.518 C23.1 C16.2
NetC17_1: C17.1 C22.1 R42.1 R43.2 | length 12.5
  Bottom Layer w0.254: R42.1 86.5,32 87.45,32.95 R43.2 ; R43.2@89.5,33 C17.1 92.45,35.05 C22.1
NetC17_2: C17.2 C22.2 R26.2 U3.1 U3.2 | length 10.4
  Bottom Layer w0.254: C17.2 C22.2@92.45,36.95 ; C22.2 94.6,36.9 94.782,36.718 94.782,36.638 94.92,36.5 U3.1@95,36.5 ; U3.2 95.38,35.88 U3.1@95.5,36 ; U3.2@95.5,33.5 95.577,33.5 96.127,32.95 R26.2
NetC18_1: C18.1 U2.1 U2.2 | length 5.7
  Bottom Layer w0.254: C18.1@61.08,33.58 U2.2 U2.1
NetC18_2: C18.2 R30.1 | length 3.6
  Bottom Layer w0.254: C18.2 R30.1
NetC19_1: C19.1 R31.2 | length 2.5
  Bottom Layer w0.254: C19.1 R31.2
NetC19_2: C19.2 U2.8 U2.9 | length 5.3
  Bottom Layer w0.254: U2.9 U2.8 74.33,20.88 C19.2
NetC23_2: C23.2 J7.01 R46.2 | length 15.4
  Bottom Layer w0.254: R46.2 98.04,18.99 98.44,18.99 99.877,20.427 99.877,20.477 100.45,21.05 C23.2 ; C23.2@100.5,20.5 100.5,17.73 J7.01
NetC25_2: C25.2 R41.1 U3.5 | length 6.5
  Bottom Layer w0.254: C25.2 92.55,22.95 93.123,23.523 93.123,23.623 U3.5 95.494,25.88 96.114,26.5 97.45,26.5 R41.1
NetC26_2: C26.2 R43.1 U3.3 | length 5.9
  Bottom Layer w0.254: R43.1 C26.2 95.29,31.05 U3.3
NetC38_1: C38.1 R27.3 R29.2 U2.7 | length 14.8
  Bottom Layer w0.254: C38.1@61.5,21.1 61.6,21 64.07,21 U2.7 62,18.69 R27.3 ; U2.7@64.5,21 65.05,21.55 R29.2@66.5,21.55
NetC41_1: C41.1 R38.3 R40.2 U2.14 | length 37.5
  Bottom Layer w0.254: R40.2@69.55,35.5 71.131,35.5 71.751,36.12 U2.14 75.19,39.5 83.5,39.5 85,38 85,25.96 R38.3 82.816,23.46 83.276,23 86.45,23 C41.1
NetC41_2: C41.2 J5.01 R45.2 | length 5.7
  Bottom Layer w0.254: R45.2 C41.2 89.32,21.05 J5.01
NetC43_1: C43.1 R62.2 | length 2.4
  Bottom Layer w0.254: C43.1@106.5,41.45 R62.2@108.95,41.45
NetC44_1: C44.1 R64.2 | length 2.5
  Bottom Layer w0.254: C44.1 R64.2
NetC45_1: C45.1 R66.2 | length 4
  Bottom Layer w0.254: C45.1@136,35 136.1,35 136.623,34.477 136.623,34.377 138,33 R66.2
NetJ3_02: J3.02 R27.1 R28.1 | length 33.9
  Bottom Layer w0.254: J3.02 55.73,25.5 57,25.5 58.5,24 58.5,10 61.014,7.486 61.474,7.486 R27.1 66.5,11.46 R28.1@66.5,16.5
NetJ4_02: J4.02 R38.1 R39.1 | length 20.9
  Bottom Layer w0.254: R39.1 74.55,35.45 75.123,36.023 75.123,36.073 77.539,38.489 83.011,38.489 84,37.5 84,35 82.73,33.73 J4.02 R38.1
NetJ5_02: J5.02 R42.2 | length 4.7
  Bottom Layer w0.254: R42.2 88.45,26.05 89.5,25 J5.02
NetJ6_01: J6.01 R20.2 U1.8 U1.9 | length 8.5
  Bottom Layer w0.254: U1.8 U1.9 48.15,23.3 R20.2 J6.01
NetJ6_02: J6.02 U1.12 | length 4.1
  Bottom Layer w0.254: U1.12 45.824,30.92 46.177,30.567 46.203,30.567 J6.02
NetJ7_02: J7.02 U3.10 U4.3 U4.5 | length 49.8
  Bottom Layer w0.254: U3.10 101.814,24.694 101.814,18.686 J7.02@106,14.5 ; J7.02 111.73,19.5 119.5,19.5 122,22 122,27.5 ; U4.5 123.04,26.46 122,27.5 ; U4.3 123.54,31.54 122,30 122,27.5
NetQ1_1: Q1.1 R4.2 | length 2.5
  Bottom Layer w0.254: Q1.1 R4.2
NetQ2_1: Q2.1 R3.2 | length 2.5
  Bottom Layer w0.254: Q2.1 R3.2
NetQ3_1: Q3.1 R2.2 | length 2.5
  Bottom Layer w0.254: Q3.1 R2.2
NetQ4_1: Q4.1 R15.2 | length 2.5
  Bottom Layer w0.254: R15.2 Q4.1
NetQ5_1: Q5.1 R16.2 | length 2.5
  Bottom Layer w0.254: R16.2 Q5.1
NetQ6_1: Q6.1 R17.2 | length 2.5
  Bottom Layer w0.254: R17.2 Q6.1
NetR8_1: R8.1 R11.2 | length 15.1
  Bottom Layer w0.254: R11.2 48.55,16.5 52.5,16.5 54,15 54,8 53.486,7.486 53.026,7.486 R8.1
NetR11_1: R11.1 R15.1 R16.1 R17.1 R18.2 | length 76.1
  Bottom Layer w0.254: R18.2@29.5,27.5 26.1,27.5 R15.1 25.95,27.55 R17.1 16.45,27.5 14.5,27.5 13,26 13,18.5 14.306,17.194 26.836,17.194 28.5,15.53 28.5,11.5 32.5,7.5 40.5,7.5 42,9 42,16.5 43.95,18.45 R11.1
NetR21_1: R21.1 R24.2 | length 2
  Bottom Layer w0.254: R24.2@35.5,18.5 R21.1@35.5,20.55
NetR22_1: R22.1 R25.2 | length 2.6
  Bottom Layer w0.254: R25.2 R22.1
NetR28_2: R28.2 R29.1 U2.6 | length 8.8
  Bottom Layer w0.254: U2.6 66.08,23.42 R29.1 ; R28.2 67.015,18.965 67.465,18.965 68,19.5 68,22.135 67.482,22.653 67.123,22.653 66.815,22.961 R29.1@66.815,23.135
NetR30_2: R30.2 R32.3 | length 7.3
  Bottom Layer w0.254: R32.3@58,47 61,44 R30.2
NetR31_1: R31.1 R33.3 | length 12.9
  Bottom Layer w0.254: R33.3 75.04,12.04 77,14 R31.1
NetR34_2: R34.2 R35.3 | length 6
  Bottom Layer w0.254: R34.2 R35.3
NetR36_1: R36.1 R37.3 | length 5.6
  Bottom Layer w0.254: R37.3 82.96,13.5 86.45,13.5 R36.1
NetR39_2: R39.2 R40.1 U2.13 | length 5
  Bottom Layer w0.254: R40.1@69.53,33.58 U2.13 71.84,33.55 R39.2
NetR47_1: R47.1 R49.1 S1.3 U3.8 | length 36
  Bottom Layer w0.254: U3.8 109.3,20.8 112.333,23.833 112.373,23.833 R49.1 ; R47.1 109.515,37.465 109.965,37.465 S1.3@113,40.5 ; R49.1@113,24.5 R49.1 ; S1.3@113.02,40.52 115.5,38.04 115.5,25.5 114.46,24.46 R49.1
NetR47_2: R47.2 R48.1 U3.13 | length 6.7
  Bottom Layer w0.254: U3.13 104.45,33.5 105.377,34.427 105.377,34.477 105.95,35.05 R48.1 106.05,35 R47.2@109,35
NetR48_2: R48.2 R62.1 U3.14 | length 7.5
  Bottom Layer w0.254: U3.14 103.96,37 105.95,37 R48.2 106.05,36.95 106.623,37.523 106.623,37.573 108.06,39.01 108.46,39.01 R62.1
NetR49_2: R49.2 R49.3 R50.1 S1.2 U3.9 | length 29.2
  Bottom Layer w0.254: U3.9 109.34,23.34 R49.2 R49.3 ; R50.1 109.442,32.558 109.982,32.558 R49.3 ; S1.2 114.5,36.5 114.5,31.04 R49.3
NetR50_2: R50.2 R51.2 U3.12 | length 6
  Bottom Layer w0.254: U3.12 105.91,30.96 R51.2 R50.2@108.95,31.05
NetR52_1: R52.1 R54.1 S2.3 U4.1 | length 26.6
  Bottom Layer w0.254: R54.1 119,25.96 119,39.04 S2.3 122.27,40.54 U4.1 126.57,37 R52.1@128,37
NetR52_2: R52.2 R53.1 U4.13 | length 9
  Bottom Layer w0.254: R53.1@130.717,36.95 130.717,36.717 130.377,36.377 130.144,36.377 129.424,35.657 129.057,35.657 R52.2 129.591,34.009 129.748,33.852 133.582,33.852 U4.13
NetR53_2: R53.2 R64.1 U4.14 | length 7
  Bottom Layer w0.254: R53.2 132.24,35.05 U4.14 133.81,39.74 R64.1
NetR54_2: R54.2 R54.3 R55.1 S2.2 U4.2 | length 20.3
  Bottom Layer w0.254: R54.2 R54.3 124.96,34 126.11,34 U4.2 122.27,38 S2.2 ; U4.2@126.27,34 127.518,32.752 128.248,32.752 R55.1@128.5,32.5
NetR55_2: R55.2 R56.2 U4.12 | length 6.2
  Bottom Layer w0.254: R55.2 129.066,31.116 129.415,31.116 130.177,31.877 130.377,31.877 130.508,32.008 R56.2@130.508,32.209 ; R56.2 133.05,32.45 U4.12@134,31.5
NetR57_1: R57.1 R59.1 S3.3 U4.7 | length 19.6
  Bottom Layer w0.254: S3.3 120.42,12.92 R59.1@120.5,13 ; R59.1 126,18.46 U4.7@126,21.38 ; U4.7 128.33,21.38 R57.1
NetR57_2: R57.2 R58.1 U4.9 | length 5.7
  Bottom Layer w0.254: R57.2 130.95,23.45 131.5,24 U4.9@134,24
NetR58_2: R58.2 R66.1 U4.8 | length 17.3
  Bottom Layer w0.254: R58.2 131.1,21.5 U4.8@133.5,21.5 ; U4.8 135,22.57 135,24.294 134.146,25.148 133.558,25.148 132.704,26.002 132.704,26.954 133.5,27.75 137.25,27.75 138,28.5 R66.1
NetR59_2: R59.2 R59.3 R60.1 S3.2 U4.6 | length 39.3
  Bottom Layer w0.254: R59.3@120.5,18 R59.2 114.04,15.5 112.5,13.96 112.5,12.5 113.5,11.5 121.5,11.5 126.5,16.5 R60.1 ; R59.3 126,23.54 U4.6@126,24
NetR60_2: R60.2 R61.2 U4.10 | length 16.4
  Bottom Layer w0.254: R60.2 133.4,18.4 136.5,21.5 136.5,25.5 135.54,26.46 U4.10
Out: C45.2 J8.5 J8.6 R67.2 | length 85
  Bottom Layer w0.254: J8.5 72.46,61.54 89,45 136,45 137.5,43.5 137.5,41 136.982,40.482 136.432,40.482 R67.2 ; C45.2 R67.2@136,40
pads on no net: S1.1 S2.1 S3.1

## Polygon pours and split planes (outlines as drawn)
Masse on Bottom Layer "NONET_L02_P000" (solid, shelved, pour order 0): 0,0 0,75 150,75 150,0
Masse on Top Layer "NONET_L01_P001" (solid, shelved, pour order 1): 0,0 0,75 150,75 150,0

## Silkscreen, mask and mechanical layers (free items; w line width, h text height)
Mechanical 1:
  lines w0.254: 0,0 0,0.5 0,75 150,75 150,0 0,0

## Text inside footprints (layer, text, board x,y; h text height)
C2: Bottom Overlay "+" at 31.58,55.262 h1.52 r180
C9: Bottom Overlay "+" at 31.58,47.262 h1.52 r180
J1: Top Overlay "3" at 42.818,46.452 h1.52 r90; Top Overlay "2" at 42.818,48.992 h1.52 r90; Top Overlay "1" at 42.818,52.04 h1.52 r90
Q1: Top Overlay "E" at 18.129,17.904 h1.52; Top Overlay "B" at 18.129,15.229 h1.52; Top Overlay "C" at 18.129,12.629 h1.52; Mechanical 13 "E" at 18.129,17.904 h1.52; Mechanical 13 "B" at 18.129,15.229 h1.52; Mechanical 13 "C" at 18.129,12.629 h1.52
Q2: Top Overlay "E" at 22.629,17.904 h1.52; Top Overlay "B" at 22.629,15.229 h1.52; Top Overlay "C" at 22.629,12.629 h1.52; Mechanical 13 "E" at 22.629,17.904 h1.52; Mechanical 13 "B" at 22.629,15.229 h1.52; Mechanical 13 "C" at 22.629,12.629 h1.52
Q3: Top Overlay "E" at 27.129,17.904 h1.52; Top Overlay "B" at 27.129,15.229 h1.52; Top Overlay "C" at 27.129,12.629 h1.52; Mechanical 13 "E" at 27.129,17.904 h1.52; Mechanical 13 "B" at 27.129,15.229 h1.52; Mechanical 13 "C" at 27.129,12.629 h1.52
Q4: Top Overlay "E" at 24.371,32.596 h1.52 r180; Top Overlay "B" at 24.371,35.271 h1.52 r180; Top Overlay "C" at 24.371,37.871 h1.52 r180; Mechanical 13 "E" at 24.371,32.596 h1.52 r180; Mechanical 13 "B" at 24.371,35.271 h1.52 r180; Mechanical 13 "C" at 24.371,37.871 h1.52 r180
Q5: Top Overlay "E" at 19.371,32.596 h1.52 r180; Top Overlay "B" at 19.371,35.271 h1.52 r180; Top Overlay "C" at 19.371,37.871 h1.52 r180; Mechanical 13 "E" at 19.371,32.596 h1.52 r180; Mechanical 13 "B" at 19.371,35.271 h1.52 r180; Mechanical 13 "C" at 19.371,37.871 h1.52 r180
Q6: Top Overlay "E" at 14.871,32.596 h1.52 r180; Top Overlay "B" at 14.871,35.271 h1.52 r180; Top Overlay "C" at 14.871,37.871 h1.52 r180; Mechanical 13 "E" at 14.871,32.596 h1.52 r180; Mechanical 13 "B" at 14.871,35.271 h1.52 r180; Mechanical 13 "C" at 14.871,37.871 h1.52 r180
R8: Top Overlay "3" at 48.182,12.548 h1.52 r270; Top Overlay "2" at 48.182,10.008 h1.52 r270; Top Overlay "1" at 48.182,6.96 h1.52 r270
R27: Top Overlay "3" at 57.682,12.548 h1.52 r270; Top Overlay "2" at 57.682,10.008 h1.52 r270; Top Overlay "1" at 57.682,6.96 h1.52 r270
R32: Top Overlay "3" at 62.318,46.452 h1.52 r90; Top Overlay "2" at 62.318,48.992 h1.52 r90; Top Overlay "1" at 62.318,52.04 h1.52 r90
R33: Top Overlay "3" at 67.682,12.548 h1.52 r270; Top Overlay "2" at 67.682,10.008 h1.52 r270; Top Overlay "1" at 67.682,6.96 h1.52 r270
R35: Top Overlay "3" at 52.818,46.452 h1.52 r90; Top Overlay "2" at 52.818,48.992 h1.52 r90; Top Overlay "1" at 52.818,52.04 h1.52 r90
R37: Top Overlay "3" at 77.182,12.548 h1.52 r270; Top Overlay "2" at 77.182,10.008 h1.52 r270; Top Overlay "1" at 77.182,6.96 h1.52 r270
R38: Top Overlay "3" at 86.818,22.952 h1.52 r90; Top Overlay "2" at 86.818,25.492 h1.52 r90; Top Overlay "1" at 86.818,28.54 h1.52 r90
R49: Top Overlay "1" at 108.682,24.46 h1.52 r270; Top Overlay "2" at 108.682,27.508 h1.52 r270
R54: Top Overlay "1" at 116.182,24.46 h1.52 r270; Top Overlay "2" at 116.182,27.508 h1.52 r270; Top Overlay "3" at 116.182,30.048 h1.52 r270
R59: Top Overlay "1" at 116.182,12.96 h1.52 r270; Top Overlay "2" at 116.182,16.008 h1.52 r270; Top Overlay "3" at 116.182,18.548 h1.52 r270
S1: Top Overlay "1" at 108.682,35.46 h1.52 r270; Top Overlay "3" at 108.682,41.048 h1.52 r270
S2: Top Overlay "1" at 116.182,35.46 h1.52 r270; Top Overlay "2" at 116.182,38.508 h1.52 r270; Top Overlay "3" at 116.182,41.048 h1.52 r270
S3: Top Overlay "1" at 109.746,17.714 h1.52 r90; Top Overlay "2" at 109.746,14.714 h1.52 r90; Top Overlay "3" at 109.746,12.214 h1.52 r90